# Altium PCB 175-00016_rev1 SuperFin GPIO Apps Board_OLD.PcbDoc
Units mil, origin at the board's own origin, x right, y up, seen from the top; angles counter-clockwise.
Board outline 3307.09 x 1358.27 mil, 6 copper layers (Top Layer, Mid-Layer 1, Internal Plane 1, Internal Plane 2, Internal Plane 3, Bottom Layer); 53 components, 119 nets, 342 pads, 90 vias.
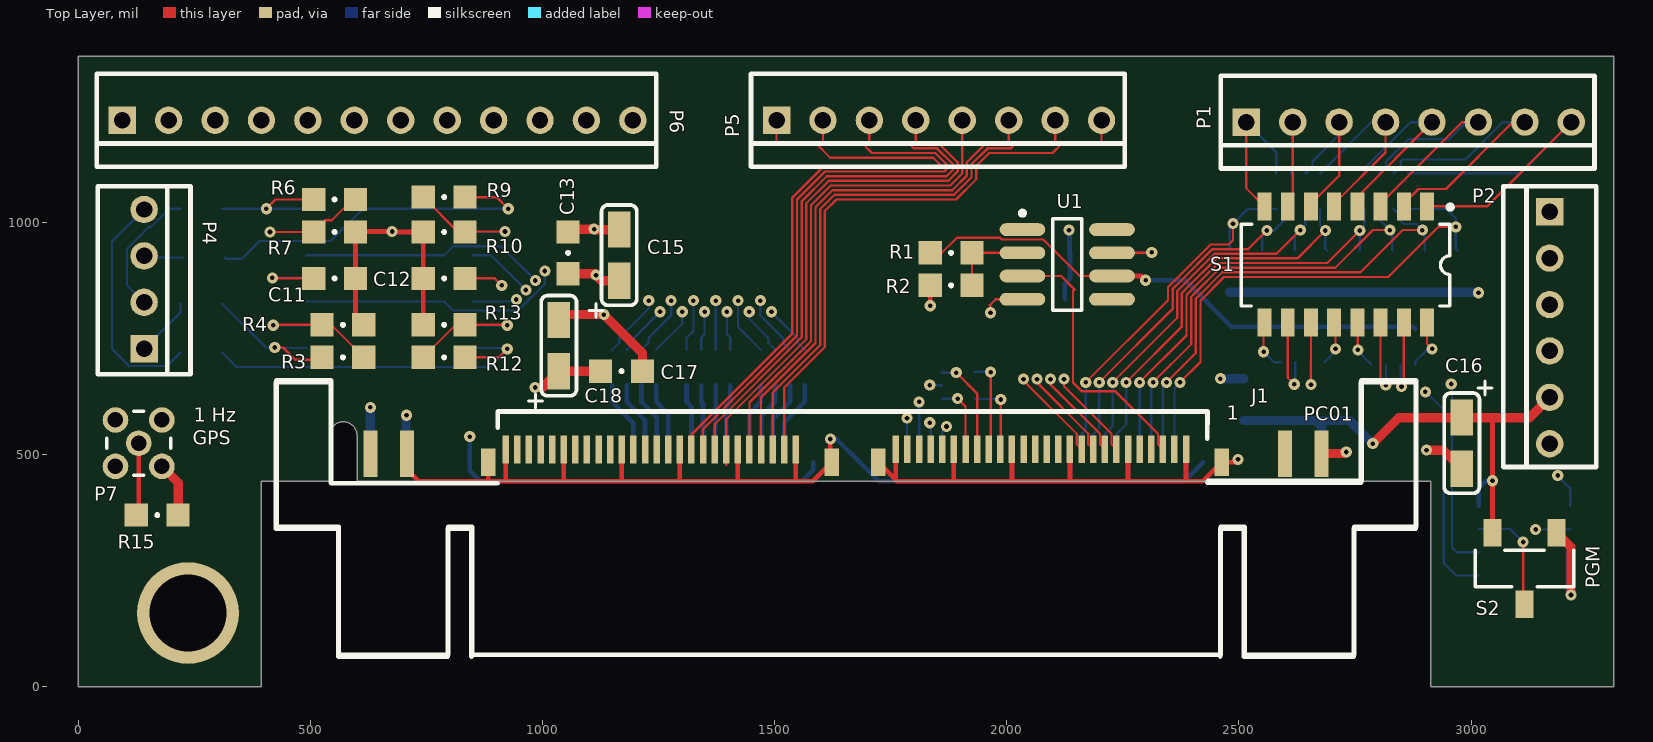
[diagram p0: Top Layer view]
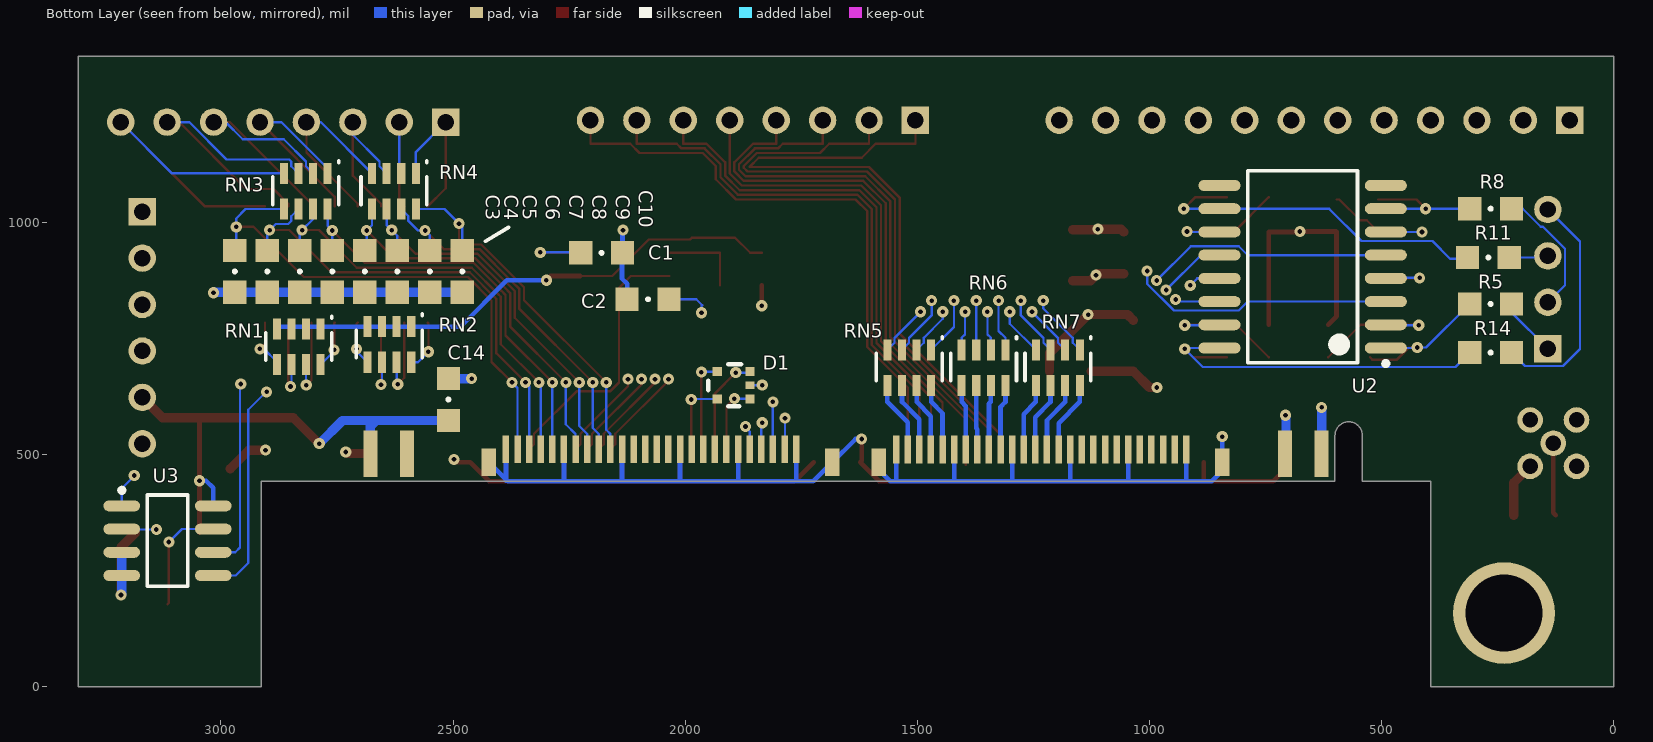
[diagram p1: Bottom Layer view, seen from below]
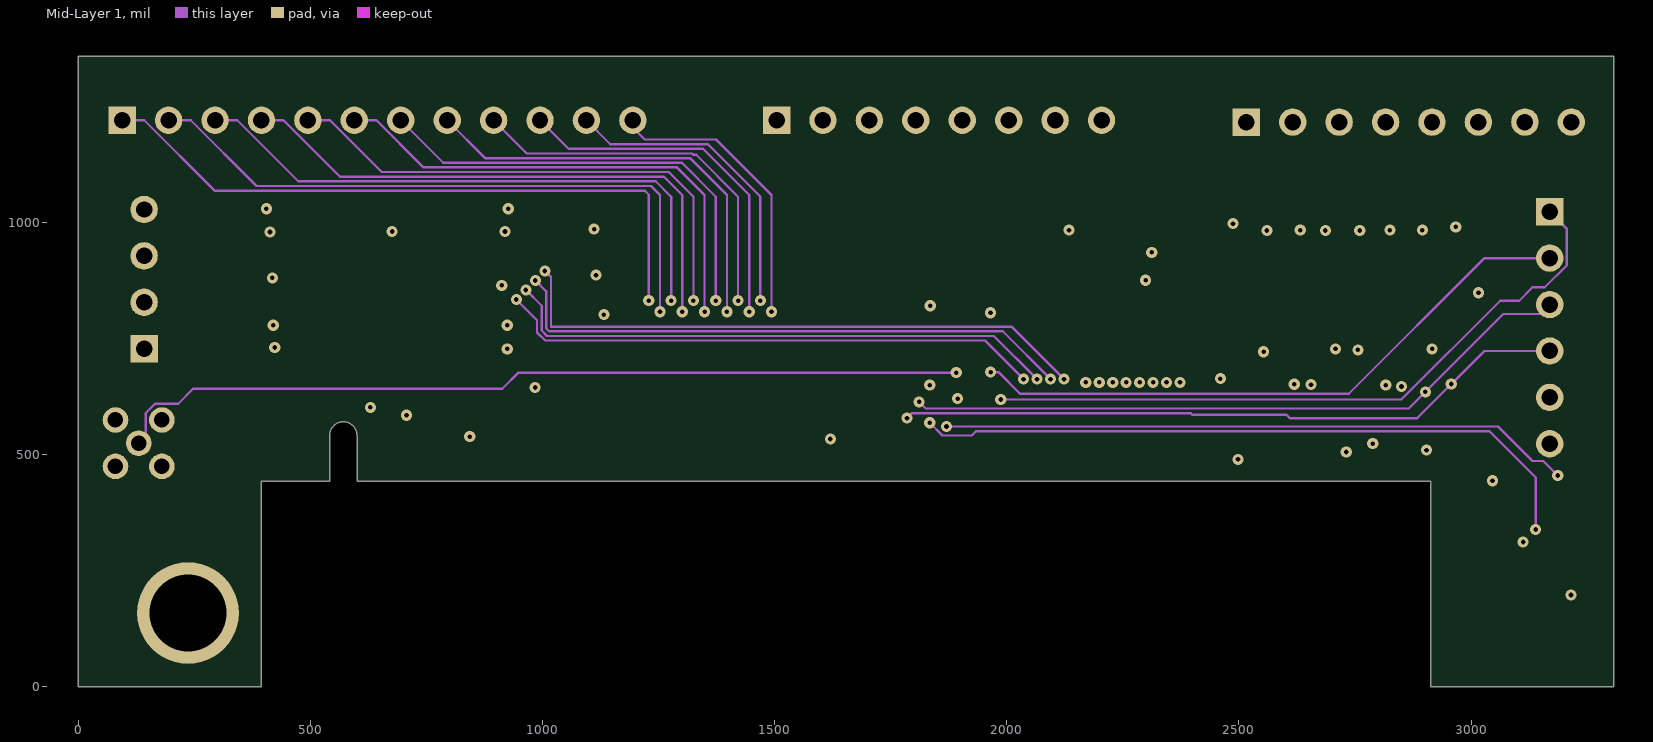
[diagram p2: Mid-Layer 1]
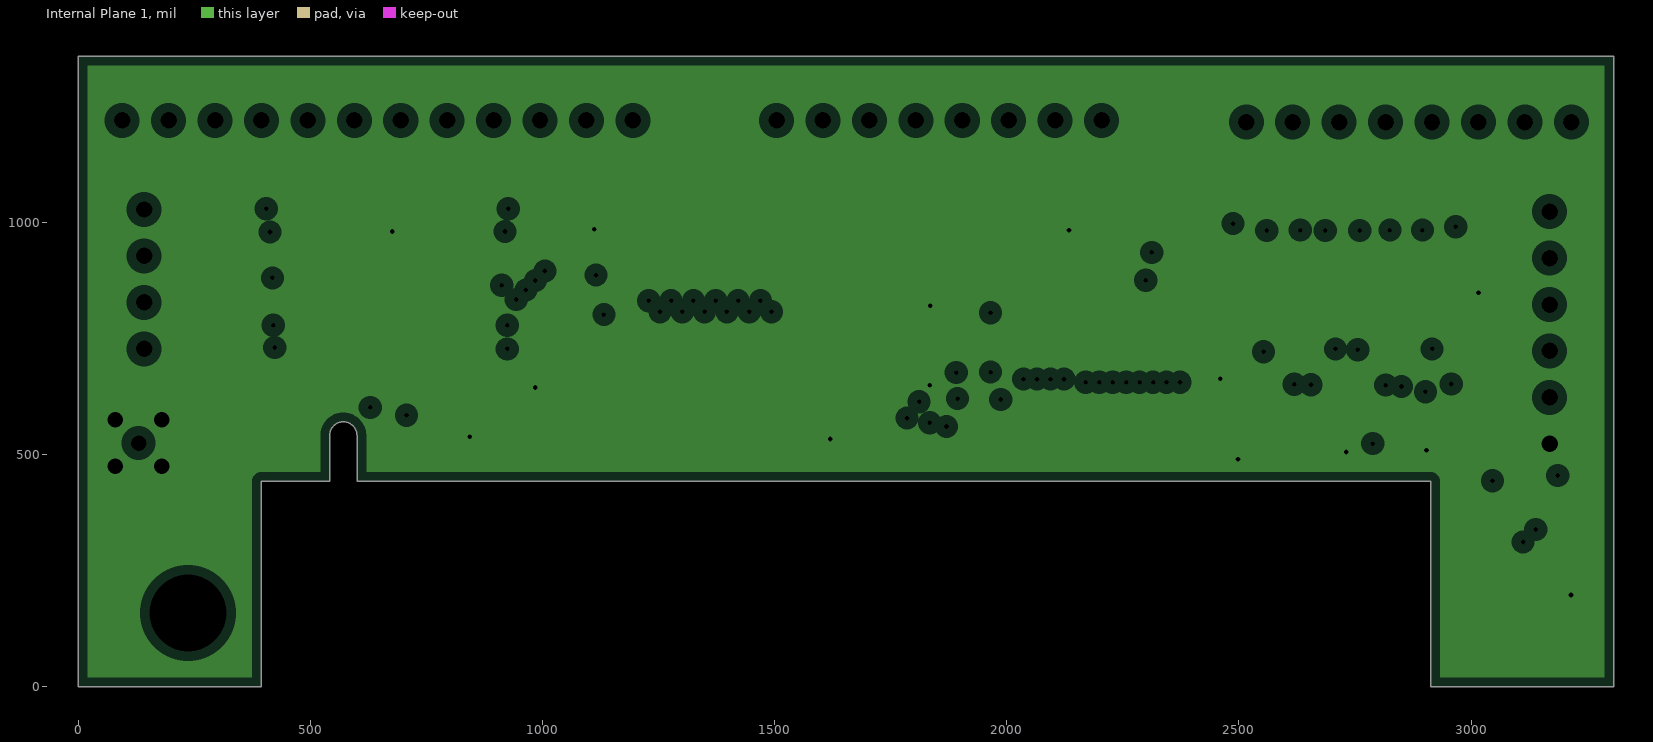
[diagram p3: Internal Plane 1, clearances drawn from the general rule]
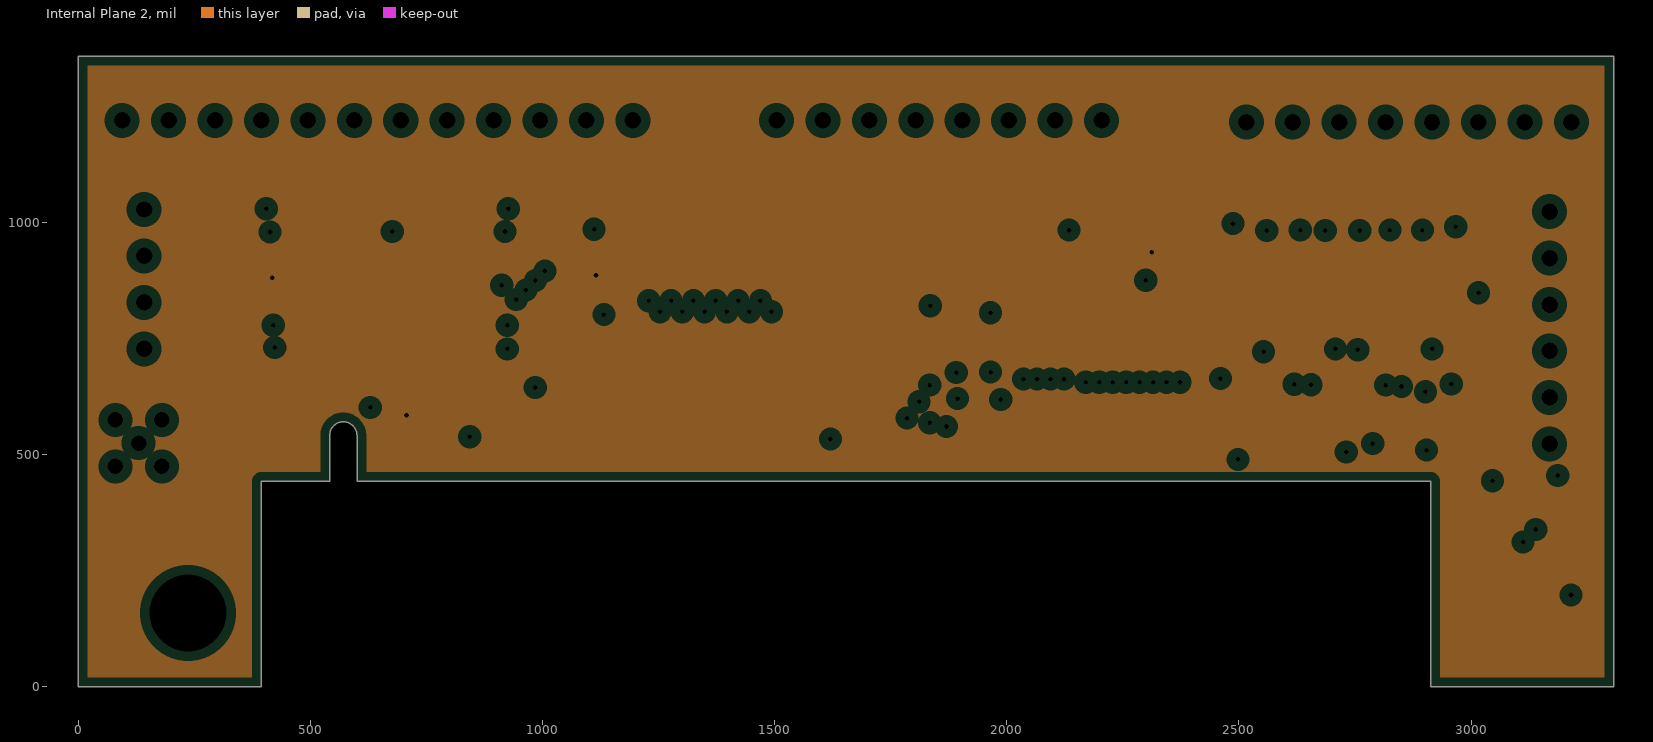
[diagram p4: Internal Plane 2, clearances drawn from the general rule]
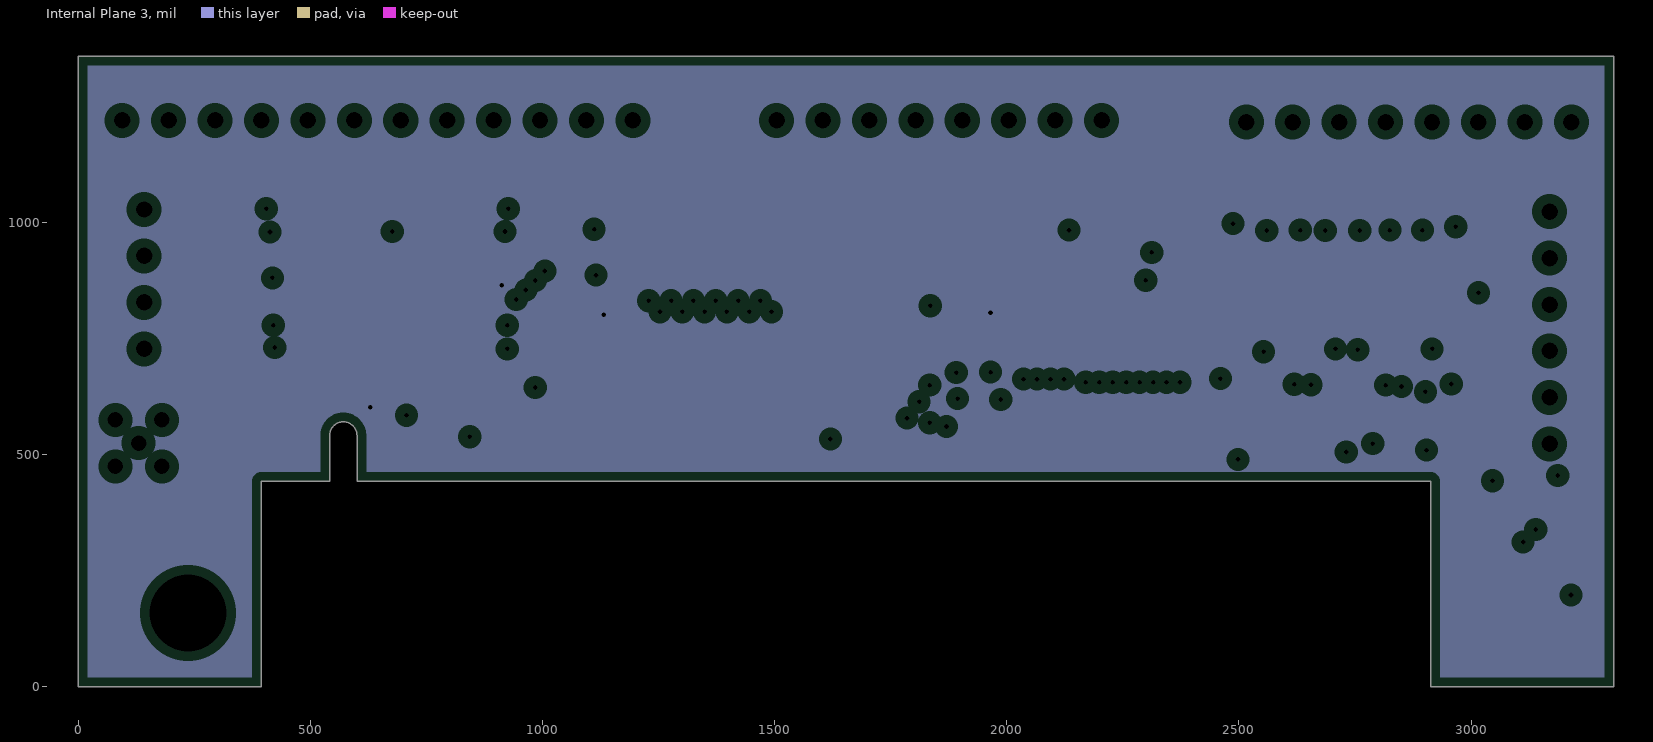
[diagram p5: Internal Plane 3, clearances drawn from the general rule]

## Layer stack, top to bottom
Top Layer: signal copper 1.4
Dielectric: core 12.6, FR-4, Dk 4.8
Mid-Layer 1: signal copper 1.4
Dielectric: prepreg 12.6, FR-4, Dk 4.8
Internal Plane 1: plane copper 1.4, net GND
Dielectric: core 12.6, FR-4, Dk 4.8
Internal Plane 2: plane copper 1.4, net +12V
Dielectric: prepreg 12.6, FR-4, Dk 4.8
Internal Plane 3: plane copper 1.4, net -12V
Dielectric: core 12.6, FR-4, Dk 4.8
Bottom Layer: signal copper 1.4

## Board outline
0,0 0,1358.27 3307.09,1358.27 3307.09,442.91 3307.09,0 2913.39,0 2913.39,442.91 600.29,442.91 600.29,541.34 ccw(c570.77,541.34) 541.24,541.34 541.24,442.91 393.7,442.91 393.7,0

## Design rules (kind name [scope] priority, off if disabled: settings)
Clearance [All] p1: gap=5
ComponentClearance ComponentClearance_1 [(InComponent('J1'))] p1: gap=-393.7 collisioncheckmode=3 verticalgap=-393.7 showdistances=FALSE
ComponentClearance [All] p2: gap=10 collisioncheckmode=3 verticalgap=10 showdistances=FALSE
HoleSize [All] p1: absolutevalues=TRUE maxlimit=250 minlimit=1 maxpercent=80.000 minpercent=20.000
MinimumSolderMaskSliver [All] p1: minsoldermaskwidth=1
PlaneClearance [All] p1: clearance=20
PlaneConnect [All] p1: planeconnectstyle=Relief reliefexpansion=20 reliefentries=4 reliefconductorwidth=10 reliefairgap=10
PolygonConnect [All] p1: connectstyle=Relief reliefconductorwidth=10 reliefentries=4 polygonreliefangle="90 Angle"
RoomDefinition "780-00019 Rev1 Pg1" [InComponentClass('780-00019 Rev1 Pg1')] p1: confinementstyle=ConfineIn formatcopy=TRUE lockcomponents=FALSE outline -75,-241 3389,-241 3389,2032.91 -75,2032.91
RoutingVias [All] p1: holewidth=10 width=24 viastyle="Through Hole" minholewidth=10 minwidth=24 maxholewidth=28 maxwidth=50
SilkToSilkClearance [All] p1: silktosilkclearance=1
SilkscreenOverComponentPads [All] p1: minsilkscreentomaskgap=1
SolderMaskExpansion [All] p1: expansion=4
Width [All] p1: maxlimit=20 minlimit=5 preferedwidth=5
21 further rules are at their usual default settings.

## Components (designator, comment, footprint, x,y, rotation, side; value= is the part's Value field where it differs from the comment)
C1 "Cap SMD" SMD_0805 2180,935 r180 bottom
C2 "Cap SMD" SMD_0805 2080,835 r0 bottom
C3 "Cap SMD" SMD_0805 2970,895 r90 bottom
C4 "Cap SMD" SMD_0805 2900,895 r90 bottom
C5 "Cap SMD" SMD_0805 2830,895 r90 bottom
C6 "Cap SMD" SMD_0805 2760,895 r90 bottom
C7 "Cap SMD" SMD_0805 2690,895 r90 bottom
C8 "Cap SMD" SMD_0805 2620,895 r90 bottom
C9 "Cap SMD" SMD_0805 2550,895 r90 bottom
C10 "Cap SMD" SMD_0805 2480,895 r90 bottom
C11 "Cap SMD" SMD_0805 551.89,880 r0 top
C12 "Cap SMD" SMD_0805 788.11,880 r180 top
C13 "Cap SMD" SMD_0805 1055,935 r90 top
C14 "Cap SMD" SMD_0805 2510,619 r90 bottom
C15 "16V" SMD_CAP_3216 1165,930 r270 top
C16 "16V" SMD_CAP_3216 2980,525 r90 top
C17 "Cap SMD" SMD_0805 1170,680 r0 top
C18 "16V" SMD_CAP_3216 1035,735 r270 top
D1 "PESD3V3L4UG" SOT-353 1860,620 r0 bottom
J1 "QMSS-EM-PC4-104pin" "QMS EDGE PWR PINS - 104 pin" 1653.54,442.91 r0 top locked
P1 "Header 8" "HDR1X8 for IDC" 2515.75,1216.54 r0 top
P2 "Header 6" "HDR1X6 for IDC" 3169.29,1023.62 r270 top
P4 "Header 4" "HDR1X4 for IDC" 141.73,728.35 r90 top
P5 "Header 8" "HDR1X8 for IDC" 1503.94,1220.47 r0 top
P6 "Header 12" "HDR1X12 for IDC" 94.49,1220.47 r0 top
P7 "COAX MMCX" MMCX2.54-V5 130,525 r0 top
R1 "Res 0805" SMD_0805 1880,935 r180 top
R2 "Res 0805" SMD_0805 1880,865 r0 top
R3 "Res 0805" SMD_0805 570,710 r180 top
R4 "Res 0805" SMD_0805 570,780 r180 top
R5 "Res 0805" SMD_0805 265,825 r0 bottom
R6 "Res 0805" SMD_0805 551.89,1050 r180 top
R7 "Res 0805" SMD_0805 551.89,980 r180 top
R8 "Res 0805" SMD_0805 265,1030 r0 bottom
R9 "Res 0805" SMD_0805 788.11,1055 r0 top
R10 "Res 0805" SMD_0805 788.11,980 r0 top
R11 "Res 0805" SMD_0805 270,925 r0 bottom
R12 "Res 0805" SMD_0805 788.11,710 r0 top
R13 "Res 0805" SMD_0805 788.11,780 r0 top
R14 "Res 0805" SMD_0805 265,720 r0 bottom
R15 "Res 0805" SMD_0805 170,370 r180 top
RN1 "RES ARRAY  x4 10K" "RES ARRAY 0603 x 4" 2785,775 r0 bottom
RN2 "RES ARRAY  x4 10K" "RES ARRAY 0603 x 4" 2590,780 r0 bottom
RN3 "RES ARRAY  x4 10K" "RES ARRAY 0603 x 4" 2770,1110 r0 bottom
RN4 "RES ARRAY  x4 10K" "RES ARRAY 0603 x 4" 2580,1110 r0 bottom
RN5 "RES ARRAY  x4 10K" "RES ARRAY 0603 x 4" 1470,730 r0 bottom
RN6 "RES ARRAY  x4 10K" "RES ARRAY 0603 x 4" 1310,730 r0 bottom
RN7 "RES ARRAY  x4 10K" "RES ARRAY 0603 x 4" 1150,730 r0 bottom
S1 "SW DIP-8 Half Pitch" "SW DIP 8 pos half pitch" 2730,910 r270 top
S2 "CJS-1200TB" CAS-120B 3115,255 r180 top
U1 "LT1007CS8#PBF" S8_M 2130,910 r0 top
U2 "LT1014ISW#PBF" SW16_N 670,905 r0 bottom
U3 "M24C32RMN1" SOP8_N 3115,315 r180 bottom

## Footprints (in the part's own frame and the unit in brackets; to place one, negate y for a bottom-side part, rotate by r counter-clockwise, add the part's x,y. Pads: shape width x height; smd on the part's side, far side on the other; paste and mask are expansions set on the pad)
CAS-120B [mm] "Copal Electronics CAS SMD Slide Switch"
  rect 1x1.5 smd: 1(-1.75,-1.95) 2(0,1.95) 3(1.75,-1.95)
  silkscreen extent -2.69,-1 2.69,1
"HDR1X4 for IDC" [mm] "Connector; Header; 4 Position"
  rect 1.5x1.5 hole 0.9: 1(0,0)
  round 1.5 hole 0.9: 2(2.54,0) 3(5.08,0) 4(7.62,0)
  silkscreen extent -1.4,-2.54 8.89,2.54
"HDR1X6 for IDC" [mm] "Connector; Header; 6 Position"
  rect 1.5x1.5 hole 0.9: 1(0,0)
  round 1.5 hole 0.9: 2(2.54,0) 3(5.08,0) 4(7.62,0) 5(10.16,0) 6(12.7,0)
  silkscreen extent -1.4,-2.54 13.97,2.54
"HDR1X8 for IDC" [mm] "Connector; Header; 8 Position"
  rect 1.5x1.5 hole 0.9: 1(0,0)
  round 1.5 hole 0.9: 2(2.54,0) 3(5.08,0) 4(7.62,0) 5(10.16,0) 6(12.7,0) 7(15.24,0) 8(17.78,0)
  silkscreen extent -1.4,-2.54 19.05,2.54
"HDR1X12 for IDC" [mm] "Connector; Header; 12 Position"
  rect 1.5x1.5 hole 0.9: 1(0,0)
  round 1.5 hole 0.9: 2(2.54,0) 3(5.08,0) 4(7.62,0) 5(10.16,0) 6(12.7,0) 7(15.24,0) 8(17.78,0) 9(20.32,0) 10(22.86,0) 11(25.4,0) 12(27.94,0)
  silkscreen extent -1.4,-2.54 29.21,2.54
MMCX2.54-V5 [mm] "Connector; RF Coaxial, MMCX, Thru-Hole; 5 Position; Vertical"
  round 1.4 hole 0.85: 1(0,0) 2(-1.27,-1.27) 3(1.27,-1.27) 4(1.27,1.27) 5(-1.27,1.27)
  silkscreen extent -1.75,-1.75 1.75,1.75
"QMS EDGE PWR PINS - 104 pin" [mil] "52 pos (104 pin) + 8 pwr pins"
  rect 14x60 smd: 0(132.45,69.15) 1(732.45,69.15) 3(707.45,69.15) 5(682.45,69.15) 7(657.45,69.15) 9(632.45,69.15) 11(607.45,69.15) 13(582.45,69.15) 15(557.45,69.15) 17(532.45,69.15) 19(507.45,69.15) 21(482.45,69.15) 23(457.45,69.15) 25(432.45,69.15) 27(407.45,69.15) 29(382.45,69.15) 31(357.45,69.15) 33(332.45,69.15) 35(307.45,69.15) 37(282.45,69.15) 39(257.45,69.15) 41(232.45,69.15) 43(207.45,69.15) 45(182.45,69.15) 47(157.45,69.15) 51(107.45,69.15) 53(-107.89,68.09) 55(-132.89,68.09) 57(-157.89,68.09) 59(-182.89,68.09) 61(-207.89,68.09) 63(-232.89,68.09) 65(-257.89,68.09) 67(-282.89,68.09) 69(-307.89,68.09) 71(-332.89,68.09) 73(-357.89,68.09) 75(-382.89,68.09) 77(-407.89,68.09) 79(-432.89,68.09) 81(-457.89,68.09) 83(-482.89,68.09) 85(-507.89,68.09) 87(-532.89,68.09) 89(-557.89,68.09) 91(-582.89,68.09) 93(-607.89,68.09) 95(-632.89,68.09) 97(-657.89,68.09) 99(-682.89,68.09) 101(-707.89,68.09) 103(-732.89,68.09)
  rect 14x60 smd far side: 2(732.45,69.15) 4(707.45,69.15) 6(682.45,69.15) 8(657.45,69.15) 10(632.45,69.15) 12(607.45,69.15) 14(582.45,69.15) 16(557.45,69.15) 18(532.45,69.15) 20(507.45,69.15) 22(482.45,69.15) 24(457.45,69.15) 26(432.45,69.15) 28(407.45,69.15) 30(382.45,69.15) 32(357.45,69.15) 34(332.45,69.15) 36(307.45,69.15) 38(282.45,69.15) 40(257.45,69.15) 42(232.45,69.15) 44(207.45,69.15) 46(182.45,69.15) 48(157.45,69.15) 50(132.45,69.15) 52(107.45,69.15) 54(-107.89,68.09) 56(-132.89,68.09) 58(-157.89,68.09) 60(-182.89,68.09) 62(-207.89,68.09) 64(-232.89,68.09) 66(-257.89,68.09) 68(-282.89,68.09) 70(-307.89,68.09) 72(-332.89,68.09) 74(-357.89,68.09) 76(-382.89,68.09) 78(-407.89,68.09) 80(-432.89,68.09) 82(-457.89,68.09) 84(-482.89,68.09) 86(-507.89,68.09) 88(-532.89,68.09) 90(-557.89,68.09) 92(-582.89,68.09) 94(-607.89,68.09) 96(-632.89,68.09) 98(-657.89,68.09) 100(-682.89,68.09) 102(-707.89,68.09) 104(-732.89,68.09)
  rect 31x60 smd: 105(809.45,41.09) 107(69.45,41.09) 109(-30.55,41.09) 111(-770.55,41.09)
  rect 31x60 smd far side: 106(769.45,41.09) 108(29.45,41.09) 110(-70.55,41.09) 112(-810.55,41.09)
  rect 30x100 smd: PC01(1024.45,59.65) PC03(945.55,59.65) PC05(-945.55,59.15) PC07(-1024.45,59.15)
  rect 30x100 smd far side: PC02(1024.45,59.65) PC04(945.55,59.65) PC06(-945.55,59.15) PC08(-1024.45,59.15)
  silkscreen extent -1228,-377 1229,217
"RES ARRAY 0603 x 4" [mm]
  rect 0.44x1.15 smd: 1(0,0.1) 2(0,2.05) 3(0.8,0.1) 4(0.8,2.05) 5(1.6,0.1) 6(1.6,2.05) 7(2.4,0.1) 8(2.4,2.05)
  silkscreen extent -0.6,-0.6 3,1.8
S8_M [mm] "SOIC, 8-Leads, Body 4.9x3.9mm, Pitch 1.27mm, IPC Low Density"
  oval 2.5x0.7 smd: 1(-2.45,1.905) 2(-2.45,0.635) 3(-2.45,-0.635) 4(-2.45,-1.905) 5(2.45,-1.905) 6(2.45,-0.635) 7(2.45,0.635) 8(2.45,1.905)
  silkscreen extent -2.57,-2.5 0.8,2.93, body extent -2,-2.5 2,2.5, height 1.76
SMD_0805 [mil]
  rect 50x50 smd: 1(-45,0) 2(45,0)
  silkscreen extent -1,-1 1,1
SMD_CAP_3216 [mil]
  rect 78x48 smd: 1(55,0) 2(-55,0)
  silkscreen extent -108,-65 134,38
SOP8_N [mm] "SOIC, 8-Leads, Body 4.9x3.9mm, Pitch 1.27mm, IPC Medium Density"
  oval 2x0.6 smd: 1(-2.5,1.905) 2(-2.5,0.635) 3(-2.5,-0.635) 4(-2.5,-1.905) 5(2.5,-1.905) 6(2.5,-0.635) 7(2.5,0.635) 8(2.5,1.905)
  silkscreen extent -2.63,-2.5 1.1,2.88, body extent -2,-2.5 2,2.5, height 1.75
SOT-353 [mm]
  rect 0.5x0.5 smd: 1(0,0) 3(0,-1.5) 4(1.8,-1.5) 5(1.8,0)
  rect 0.5x0.4 smd: 2(0,-0.75)
  silkscreen extent 0.5,-1.9 2.3,0.4
SW16_N [mm] "SOIC, 16-Leads, Body 10.3x7.5mm, Pitch 1.27mm, IPC Medium Density"
  oval 2.3x0.6 smd: 1(-4.55,4.445) 2(-4.55,3.175) 3(-4.55,1.905) 4(-4.55,0.635) 5(-4.55,-0.635) 6(-4.55,-1.905) 7(-4.55,-3.175) 8(-4.55,-4.445) 9(4.55,-4.445) 10(4.55,-3.175) 11(4.55,-1.905) 12(4.55,-0.635) 13(4.55,0.635) 14(4.55,1.905) 15(4.55,3.175) 16(4.55,4.445)
  silkscreen extent -4.67,-5.25 3,5.42, body extent -3.75,-5.25 3.75,5.25, height 2.65
"SW DIP 8 pos half pitch" [mil] "Grayhill 97C08ST, 8 SPST switch, surface mount"
  rect 60x30 smd: 1(-125,175) 2(-125,125) 3(-125,75) 4(-125,25) 5(-125,-25) 6(-125,-75) 7(-125,-125) 8(-125,-175) 9(125,-175) 10(125,-125) 11(125,-75) 12(125,-25) 13(125,25) 14(125,75) 15(125,125) 16(125,175)
  silkscreen extent -128,-225 90,230

## Part data
C1 C2 C11 C12 C13 C14 C17: "Capacitor"
C3 C4 C5 C6 C7 C8 C9 C10: "Capacitor NP0"
C15 C16 C18: library part "Cap Tant 16V", "outline 3.2mm x 1.6mm"
D1: library part "ESD Diode 3.3V Quad", "Quad ESD Diode 3.3V"
J1: "SAMTEC QMSS EDGE W/PWR PINS"
P1 P5: "Header, 8-Pin"
P2: "Header, 6-Pin"
P4: "Header, 4-Pin"
P6: "Header, 12-Pin"
P7: library part COAX-M, "RF Coaxial PCB Connector, MMCX; Thru-Hole, Vertical Mount Plug,  50 Ohm Impedance"
R1 R2 R3 R4 R5 R6 R7 R8 R9 R10 R11 R12 R13 R14 R15: library part "Res SMD", "Resistor 0805"
RN1 RN2 RN3 RN4 RN5 RN6 RN7: "Resistor Array 4 Isolated"
S1: "DIP Switch, 8 Position, SPST"
S2: library part SW_SPDT_DOUG
U1: "Low Noise BJT input opamp"
U2: "Quad Precision Operational Amplifier"
U3: "32 Kbit Serial I²C Bus EEPROM"

## Free pads (board coordinates)
  round 218.9 hole 166.14 unplated: 0(236.22,159.06)

## Via types
v1: diameter 24, hole 10, Top Layer to Bottom Layer, 90 vias

## Nets (pads, with @x,y where several pads share a name; then routed paths per layer and width w, separated by ;. In a path a pad name is that pad's centre, name@x,y a point inside that pad or via, vN(x,y) a via of type N, cw(c..) or ccw(c..) an arc to the next point about the centre after c; other vN are vias at no path point)
2.500VREF: J1.5 U1.3 | length 592.3
  Top Layer w5: U1.3 2117,885 2146,856 2142.5,852.5 2142.5,655.92 2161.92,636.5 2234.16,636.5 2325.49,545.17 2325.49,522.56 J1.5
4.096VREF: J1.3
+3.3V: C14.1 C16.1 J1.PC02 P2.5 S2.3 U3.8 | length 1121.6
  Top Layer w10: S2.3 v1(3046.1,444) 3046.1,579.1 3047,580
  Top Layer w20: v1(2788,524) 2844,580 C16.1 3047,580 3125.67,580 P2.5
  Bottom Layer w10: U3.8 3016.57,428.57 3032,444 v1(3046.1,444)
  Bottom Layer w20: C14.1 2666,574 ; J1.PC02 2677.99,559.99 2679,561 2666,574 ; v1(2788,524) 2738,574 2666,574
+5V: J1.PC04
+12V: C1.1 C11.1 C13.1 C15.1 J1.PC06 U1.7 U2.4 | length 536.3
  Top Layer w5: v1(418,881) 419,880 C11.1 ; U1.7 2311,935 v1(2312,936)
  Top Layer w20: C13.1 1112,890 v1(1115,887) 1127,875 C15.1
  Bottom Layer w5: v1(418,881) 489.87,881 U2.4 ; C1.1 2226,936 v1(2312,936)
  Bottom Layer w20: v1(707,585) 706,584 706,504.05 J1.PC06
+24V: J1.PC07
+48V: J1.PC03
-12V: C2.1 C12.1 C17.2 C18.2 J1.PC08 U1.4 U2.13 | length 699.2
  Top Layer w5: C12.1 897,880 v1(912,865) ; v1(1964.65,806) 1964.65,820.35 1963,822 1976,835 U1.4
  Top Layer w20: C18.2 1047,802 v1(1132,802) 1215,719 C17.2
  Bottom Layer w5: U2.13 897,880 v1(912,865) ; v1(1964.65,806) 1964.65,820.35 1963,822 1976,835 C2.1
  Bottom Layer w20: v1(629,602) 629.09,601.91 J1.PC08
ANALOG_IN0: C3.2 J1.4 RN3.8 | length 1140.2
  Top Layer w5: v1(2372.99,656) 2417,700.01 2417,832 2468,883 2821.58,883 2929.58,991 v1(2967,991)
  Bottom Layer w5: J1.4 2360.99,644 v1(2372.99,656) ; RN3.8 2946.71,1029.29 2967,1009 v1(2967,991) 2967,943 C3.2
ANALOG_IN1: C4.2 J1.6 RN3.6 | length 1035.7
  Top Layer w5: v1(2343.99,656) 2407,719.01 2407,836.14 2409.93,839.07 2463.86,893 2761.58,893 2852.58,984 v1(2895,984)
  Bottom Layer w5: J1.6 2335.99,648 v1(2343.99,656) ; RN3.6 2848.33,1013.96 2848.33,1003.55 2854.87,997 2882,997 v1(2895,984) 2900,979 C4.2
ANALOG_IN2: C5.2 J1.8 RN3.4 | length 952.5
  Top Layer w5: v1(2314.99,656) 2397,738.01 2397,840.28 2402.86,846.14 2459.72,903 2707.58,903 2788.58,984 v1(2825,984)
  Bottom Layer w5: J1.8 2310.99,652 v1(2314.99,656) ; RN3.4 2801.5,1007.5 v1(2825,984) 2830,979 C5.2
ANALOG_IN3: C6.2 J1.10 RN3.2 | length 898
  Top Layer w5: v1(2285.99,656) 2387,757.01 2387,844.43 2395.79,853.21 2455.57,913 2690,913 v1(2760,983)
  Bottom Layer w5: J1.10 v1(2285.99,656) ; C6.2 v1(2760,983) 2770,993 RN3.2
ANALOG_IN4: C7.2 J1.14 RN4.8 | length 855.3
  Top Layer w5: v1(2256.99,656) 2377,776.01 2377,848.57 2388.72,860.28 2451.43,923 2626,923 v1(2686,983)
  Bottom Layer w5: J1.14 2235.99,544.91 2256.99,565.91 v1(2256.99,656) ; RN4.8 2674.49,994.51 v1(2686,983) 2686,944 C7.2
ANALOG_IN5: C8.2 J1.16 RN4.6 | length 823.5
  Top Layer w5: v1(2227.99,656) 2367,795.01 2367,852.71 2381.64,867.36 2447.29,933 2581,933 v1(2632,984)
  Bottom Layer w5: J1.16 2210.99,544.91 2227.99,561.91 v1(2227.99,656) ; C8.2 2620,972 v1(2632,984) 2642.99,994.99 RN4.6
ANALOG_IN6: C9.2 J1.18 RN4.4 | length 794.8
  Top Layer w5: v1(2198.99,656) 2357,814.01 2357,856.85 2374.57,874.43 2443.15,943 2520,943 v1(2560,983)
  Bottom Layer w5: J1.18 2185.99,544.91 2198.99,557.91 v1(2198.99,656) ; C9.2 2550,973 v1(2560,983) 2575.61,983 2596.16,1003.55 2596.16,1013.96 RN4.4
ANALOG_IN7: C10.2 J1.20 RN4.2 | length 810.7
  Top Layer w5: v1(2169.99,656) 2347,833.01 2347,860.99 2367.5,881.5 2439.01,953 2478,953 2487,962 v1(2487,998)
  Bottom Layer w5: J1.20 2160.99,544.91 2169.99,553.91 v1(2169.99,656) ; C10.2 2480,991 v1(2487,998) 2518.29,1029.29 RN4.2
DAC_OUT0: J1.13 U2.3 | length 2048.6
  Top Layer w5: v1(2123,663) 2123,647.66 2225.49,545.17 2225.49,522.56 J1.13
  Mid-Layer 1 w5: v1(1005,896) 1018,883 1018,776 2010,776 v1(2123,663)
  Bottom Layer w5: U2.3 788.36,830 807.67,810.69 947.27,810.69 1005,868.42 v1(1005,896)
DAC_OUT1: J1.15 U2.5 | length 1976.1
  Top Layer w5: v1(2094,663) 2094,651.66 2200.49,545.17 2200.49,522.56 J1.15
  Mid-Layer 1 w5: v1(984.49,875.49) 1008,851.99 1008,771.86 1013.86,766 1991,766 v1(2094,663)
  Bottom Layer w5: U2.5 788.36,930 807.67,949.31 910.68,949.31 v1(984.49,875.49)
DAC_OUT2: J1.17 U2.12 | length 1558.7
  Top Layer w5: v1(2065,663) 2065,655.66 2175.49,545.17 2175.49,522.56 J1.17
  Mid-Layer 1 w5: v1(963.99,854.99) 998,820.98 998,767.72 1009.72,756 1972,756 v1(2065,663)
  Bottom Layer w5: U2.12 888.98,930 v1(963.99,854.99)
DAC_OUT3: J1.19 U2.14 | length 1474.6
  Top Layer w5: v1@2036,659.66 2150.49,545.17 2150.49,522.56 J1.19
  Mid-Layer 1 w5: v1(943.48,834.48) 988,789.96 988,763.57 1005.57,746 1953,746 v1(2036,663)
  Bottom Layer w5: U2.14 939,830 v1(943.48,834.48)
DIRECTION1: J1.99
DIRECTION2: J1.101
GND: C1.2 C2.2 C3.1 C4.1 C5.1 C6.1 C7.1 C8.1 C9.1 C10.1 C11.2 C12.2 C13.2 C14.2 C15.2 C16.2 C17.1 C18.1 D1.2 J1.1 J1.2 J1.11 J1.12 J1.21 J1.22 J1.31 J1.32 J1.41 J1.42 J1.51 J1.52 J1.53 J1.54 J1.63 J1.64 J1.73 J1.74 J1.83 J1.84 J1.93 J1.94 J1.103 J1.104 J1.105 J1.106 J1.107 J1.108 J1.109 J1.110 J1.111 J1.112 J1.PC01 J1.PC05 P2.6 P7.2 P7.3 P7.4 P7.5 R2.1 R4.1 R7.1 R10.1 R13.1 R15.1 S2.1 U3.3 U3.4 | length 7358.1
  Top Layer w10: R4.1 596.89,798.11 R7.1 597.89,981 v1(676,981) 677,980 R10.1 C12.2 R13.1 ; J1.PC05 707.99,467.92 733,442.91 885,442.91 ; J1.111 882.99,444.92 885,442.91 ; 920.65,442.86 920.65,442.91 ; J1.103 920.65,442.91 ; 1045.65,442.86 1045.65,442.91 ; J1.93 1045.65,442.91 ; 1170.65,442.86 1170.65,442.91 ; J1.83 1170.65,442.91 ; 1295.65,442.86 1295.65,442.91 ; J1.73 1295.65,442.91 ; 1420.65,442.86 1420.65,442.91 ; J1.63 1420.65,442.91 ; 1545.65,442.86 1545.65,442.91 ; J1.53 1545.65,442.91 ; v1(1620,534) 1620,487 J1.109 1581.9,442.91 1545.65,442.91 ; J1.107 1764.08,442.91 2387,442.91 ; 1760.99,443.92 J1.51 ; v1(1835,821) R2.1 ; 1885.99,443.92 J1.41 ; 2010.99,443.92 J1.31 ; 2135.99,443.92 J1.21 ; 2260.99,443.92 J1.11 ; J1.1 2385.99,443.92 2387,442.91 ; v1(2498,490) 2492,484 J1.105 2421.9,442.91 2387,442.91 ; 885,442.91 920.65,442.91 ; 920.65,442.91 1045.65,442.91 ; 1045.65,442.91 1170.65,442.91 ; 1170.65,442.91 1295.65,442.91 ; 1295.65,442.91 1420.65,442.91 ; 1420.65,442.91 1545.65,442.91
  Top Layer w20: P7.3 215,440 R15.1 ; v1(984,645) 1000,645 C18.1 C17.1 ; C13.2 1061,986 v1(1111,986) 1112,985 C15.2 ; J1.PC01 2727.56,502.56 v1(2731,506) ; v1(2904,510) 2940,510 C16.2 ; S2.1 3215,300.67 v1(3215,198)
  Bottom Layer w5: v1(1834,650) 1834.47,649.53 D1.2
  Bottom Layer w10: v1@842.99,538.99 842.99,465.92 866,442.91 921,442.91 ; J1.104 920.65,455 920.65,443.26 921,442.91 ; 1045.65,442.91 J1.94 ; 1170.65,442.91 J1.84 ; 1295.65,442.91 J1.74 ; 1420.65,442.91 J1.64 ; 1545.65,442.91 J1.54 ; J1.110 1582.99,467.91 1558,442.91 921,442.91 ; v1(1620,534) 1633,534 J1.108 1724.08,442.91 1761,442.91 ; J1.52 1760.99,442.92 ; 1885.99,443.97 J1.42 ; 2010.99,443.97 J1.32 ; C2.2 2125,868 2136,879 2136,934 C1.2 2135,983 v1(2134,984) ; J1.22@2135.99,504 2135.99,442.91 ; 2260.99,443.97 J1.12 ; 2385.99,443.97 2385.99,447 ; J1.2 2385.99,447 ; J1.106 2385.99,447 ; 1761,442.91 2135.99,442.91 ; 2135.99,442.91 2381.9,442.91 2385.99,447
  Bottom Layer w20: v1(2460,664) C14.2 ; C10.1 3015,850 v1(3016,849) ; U3.3 U3.4 3213.43,199.57 v1(3215,198)
  other v1: 843,539
GP_I/OSPARE0: D1.5 J1.33 P2.1 | length 1633.7
  Top Layer w5: J1.33 1987,513.07 v1(1987,619)
  Mid-Layer 1 w5: v1(1987,619) 2849.58,619 3062.58,832 3103.61,832 3132.26,860.65 3158.68,860.65 3206.32,908.28 3206.32,986.59 P2.1
  Bottom Layer w5: D1.5 1986,620 v1(1987,619)
GP_I/OSPARE1: D1.4 J1.35 P2.2 | length 1546.7
  Top Layer w5: J1.35 1965,516.07 v1(1965,678)
  Mid-Layer 1 w5: v1(1965,678) 1982,678 2028.5,631.5 2736.5,631.5 3028.62,923.62 P2.2
  Bottom Layer w5: D1.4 1963.94,679.06 v1(1965,678)
GP_I/OSPARE2: D1.3 J1.37 P7.1 R15.2 | length 2225.5
  Top Layer w5: v1(1891,677) 1935.99,632.01 J1.37
  Top Layer w10: R15.2 130,375 P7.1
  Mid-Layer 1 w5: P7.1 144.94,539.94 144.94,589.52 165.48,610.06 215.06,610.06 247,642 913,642 948,677 v1(1891,677)
  Bottom Layer w5: D1.3 1862.06,677 v1(1891,677)
GP_I/OSPARE3: D1.1 J1.39 | length 150.4
  Top Layer w5: v1(1894,621) 1910.99,604.01 J1.39
  Bottom Layer w5: D1.1 1861,621 v1(1894,621)
GP_I/OSPARE4: J1.43
GP_I/OSPARE5: J1.45
GP_I/OSPARE6: J1.47
GP_OUT_D0: J1.55 P5.8 | length 1273.2
  Top Layer w5: J1.55 1520.65,644.92 1608,732.27 1608,1025.01 1632.99,1050 1890.51,1050 1933.94,1093.43 1933.94,1121.72 1962.22,1150 2098.08,1150 2118.08,1170 2203.94,1170 P5.8
GP_OUT_D1: J1.57 P5.7 | length 1191.9
  Top Layer w5: J1.57 1495.65,634.06 1598,736.41 1598,1029.15 1628.85,1060 1886.36,1060 1923.94,1097.57 1923.94,1125.86 1958.08,1160 2008.08,1160 2018.08,1170 2103.94,1170 P5.7
GP_OUT_D2: J1.59 P5.6 | length 1110.5
  Top Layer w5: J1.59 1470.65,623.2 1588,740.55 1588,1033.29 1624.71,1070 1882.22,1070 1913.94,1101.72 1913.94,1130 1953.94,1170 2003.94,1170 P5.6
GP_OUT_D3: J1.61 P5.5 | length 1050.1
  Top Layer w5: J1.61 1445.65,612.34 1578,744.69 1578,1037.43 1620.57,1080 1878.08,1080 1903.94,1105.86 P5.5
GP_OUT_D4: J1.65 P5.4 | length 1199.5
  Top Layer w5: J1.65 1395.65,477.91 1395.65,576.49 1568,748.84 1568,1041.57 1616.43,1090 1873.94,1090 1893.94,1110 1893.94,1130 1853.94,1170 1803.94,1170 P5.4
GP_OUT_D5: J1.67 P5.3 | length 1227.1
  Top Layer w5: J1.67 1370.65,565.63 1558,752.98 1558,1045.72 1612.28,1100 1869.79,1100 1883.94,1114.14 1883.94,1125.86 1849.79,1160 1799.79,1160 1789.79,1170 1703.94,1170 P5.3
GP_OUT_D6: J1.69 P5.2 | length 1320.9
  Top Layer w5: J1.69 1345.65,554.77 1548,757.12 1548,1049.86 1608.14,1110 1865.65,1110 1873.94,1118.28 1873.94,1121.72 1845.65,1150 1709.79,1150 1689.79,1170 1603.94,1170 P5.2
GP_OUT_D7: J1.71 P5.1 | length 1412.6
  Top Layer w5: J1.71 1320.65,543.91 1538,761.26 1538,1054 1604,1120 1861.51,1120 1841.51,1140 1619.79,1140 1589.79,1170 1503.94,1170 P5.1
GP_OUT_D8: J1.75
GP_OUT_D9: J1.77
GP_OUT_D10: J1.79
GP_OUT_D11: J1.81
GP_OUT_D12: J1.85
GP_OUT_D13: J1.87
GP_OUT_D14: J1.89
GP_OUT_D15: J1.91
I2C_SCL: J1.50 P2.4 U3.6 | length 1934.9
  Mid-Layer 1 w5: v1(1785,579) 1795.37,589.38 2396.31,589.38 2399.69,586 2602.25,586 2609.25,579 2884,579 3028.62,723.62 P2.4
  Bottom Layer w5: v1(1785,579) 1785,513.05 J1.50 ; v1(2957.34,652.34) 2959,650.68 2959,300 2969,290 U3.6
I2C_SDA: J1.48 P2.3 U3.5 | length 2031.2
  Mid-Layer 1 w5: v1(1811,614) 1825.5,599.5 2865.5,599.5 3069.26,803.26 3148.93,803.26 P2.3
  Bottom Layer w5: J1.48@1811,512.07 v1(1811,614) ; v1(2901.56,635.56) 2902.44,635.56 2941,597 2941,267 2968,240 U3.5
NetP1_1: P1.1 RN4.1 S1.8 | length 334.9
  Top Layer w5: P1.1 2515.75,1074.25 S1.8
  Bottom Layer w5: P1.1 2580,1152.28 RN4.1
NetP1_2: P1.2 RN4.3 S1.7 | length 298.2
  Top Layer w5: S1.7 2615.75,1045.75 P1.2
  Bottom Layer w5: RN4.3 2615.75,1110.31 P1.2
NetP1_3: P1.3 RN4.5 S1.6 | length 347.3
  Top Layer w5: S1.6 2655,1040.61 2715.75,1101.35 P1.3
  Bottom Layer w5: RN4.5 2658.33,1121.4 2658.33,1131.81 2715.75,1189.23 P1.3
NetP1_4: P1.4 RN4.7 S1.5 | length 414.4
  Top Layer w5: S1.5 2705,1040.61 2815.75,1151.35 P1.4
  Bottom Layer w5: RN4.7 2784.96,1216.54 P1.4
NetP1_5: P1.5 RN3.1 S1.4 | length 445.7
  Top Layer w5: S1.4 2755,1055.79 P1.5
  Bottom Layer w5: RN3.1 2770,1116.47 2870.06,1216.54 P1.5
NetP1_6: P1.6 RN3.3 S1.3 | length 555.3
  Top Layer w5: S1.3 2805,1040.61 2980.93,1216.54 P1.6
  Bottom Layer w5: RN3.3 2816.83,1121.4 2816.83,1131.81 2864.53,1179.51 2952.78,1179.51 2989.8,1216.54 P1.6
NetP1_7: P1.7 RN3.5 S1.2 | length 673.8
  Top Layer w5: S1.2 2855,1040.61 2886.89,1072.5 2945.77,1072.5 3089.8,1216.54 P1.7
  Bottom Layer w5: RN3.5 2848.33,1121.4 2848.33,1131.81 2852.72,1136.2 2987.78,1136.2 3068.11,1216.54 P1.7
NetP1_8: P1.8 RN3.7 S1.1 | length 783
  Top Layer w5: S1.1 3034.21,1035 P1.8
  Bottom Layer w5: RN3.7 3105.28,1106.06 P1.8
NetP4_1: P4.1 R5.1 | length 129.1
  Bottom Layer w5: P4.1 220,806.61 R5.1
NetP4_2: P4.2 R8.1 | length 281.7
  Bottom Layer w5: P4.2 104.7,865.37 104.7,943.68 152.34,991.32 157.07,991.32 195.75,1030 R8.1
NetP4_3: P4.3 R11.1 | length 84.7
  Bottom Layer w5: P4.3 145.08,925 R11.1
NetP4_4: P4.4 R14.1 | length 503.5
  Bottom Layer w5: P4.4 72.68,959.3 72.68,727.74 109.1,691.32 191.32,691.32 R14.1
NetP6_1: P6.1 RN7.1 | length 1567.4
  Mid-Layer 1 w5: P6.1 142.12,1220.47 293.6,1069 1220,1069 1228.74,1060.26 1228.74,1056 v1(1228.74,832)
  Bottom Layer w5: RN7.1 1165.33,741.4 1165.33,751.81 1228.74,815.22 v1(1228.74,832)
NetP6_2: P6.2 RN7.3 | length 1488
  Mid-Layer 1 w5: P6.2 242.12,1220.47 383.6,1079 1233.32,1079 1252.78,1059.54 1252.78,1031.96 v1(1252.78,807.96)
  Bottom Layer w5: RN7.3 1196.83,741.4 1196.83,751.81 1252.78,807.76 v1(1252.78,807.96)
NetP6_3: P6.3 RN7.5 | length 1406.8
  Mid-Layer 1 w5: P6.3 342.12,1220.47 473.6,1089 1243.83,1089 1276.83,1056 v1(1276.83,832)
  Bottom Layer w5: RN7.5 1228.33,741.4 1228.33,751.81 1276.83,800.31 v1(1276.83,832)
NetP6_4: P6.4 RN7.7 | length 1329.9
  Mid-Layer 1 w5: P6.4 442.12,1220.47 563.6,1099 1261.4,1099 1300.87,1059.54 v1(1300.87,807.96)
  Bottom Layer w5: RN7.7 1300.87,782.44 v1(1300.87,807.96)
NetP6_5: P6.5 RN6.1 | length 1234.7
  Mid-Layer 1 w5: P6.5 542.12,1220.47 653.6,1109 1271.91,1109 1324.91,1056 v1(1324.91,832)
  Bottom Layer w5: RN6.1 1310,751.91 1324.91,766.82 v1(1324.91,832)
NetP6_6: P6.6 RN6.3 | length 1157.7
  Mid-Layer 1 w5: P6.6 642.12,1220.47 743.6,1119 1289.49,1119 1348.95,1059.54 v1(1348.95,807.96)
  Bottom Layer w5: RN6.3 1341.5,751.91 1348.95,759.37 v1(1348.95,807.96)
NetP6_7: P6.7 RN6.5 | length 1076.6
  Mid-Layer 1 w5: P6.7 785.96,1129 1299.99,1129 1372.99,1056 v1(1372.99,832)
  Bottom Layer w5: RN6.5 v1(1372.99,832)
NetP6_8: P6.8 RN6.7 | length 1005.8
  Mid-Layer 1 w5: P6.8 875.96,1139 1317.57,1139 1397.03,1059.54 v1(1397.03,807.96)
  Bottom Layer w5: v1(1397.03,807.96) 1397.03,759.37 1404.49,751.91 RN6.7
NetP6_9: P6.9 RN5.1 | length 944.9
  Mid-Layer 1 w5: P6.9 965.96,1149 1321.71,1149 1324.67,1146.04 1331.04,1146.04 1421.08,1056 v1(1421.08,832)
  Bottom Layer w5: v1(1421.08,832) 1421.08,774.99 RN5.1
NetP6_10: P6.10 RN5.3 | length 874.1
  Mid-Layer 1 w5: P6.10 1055.96,1159 1345.65,1159 1445.12,1059.54 v1(1445.12,807.96)
  Bottom Layer w5: v1(1445.12,807.96) 1445.12,792.85 1486.16,751.81 1486.16,741.4 RN5.3
NetP6_11: P6.11 RN5.5 | length 799.2
  Mid-Layer 1 w5: P6.11 1145.96,1169 1356.16,1169 1469.16,1056 v1(1469.16,832)
  Bottom Layer w5: v1(1469.16,832) 1469.16,800.31 1517.66,751.81 1517.66,741.4 RN5.5
NetP6_12: P6.12 RN5.7 | length 737.7
  Mid-Layer 1 w5: P6.12 1194.49,1204.51 1220,1179 1373.74,1179 1493.2,1059.54 v1(1493.2,807.96)
  Bottom Layer w5: v1(1493.2,807.96) 1493.2,807.76 1549.15,751.81 1549.15,741.4 RN5.7
NetR1_1: R1.1 R2.2 U1.2 | length 178.5
  Top Layer w5: R2.2 R1.1 U1.2
NetR1_2: R1.2 RN1.1 RN1.3 RN1.5 RN1.7 RN2.1 RN2.3 RN2.5 RN2.7 U1.6 | length 1139.3
  Top Layer w5: R1.2 1860,935 1892.5,967.5 1985.52,967.5 1989.3,963.72 2078.28,963.72 2157,885 U1.6
  Top Layer w10: U1.6 2290,885 v1(2299,876)
  Bottom Layer w10: v1(2299,876) 2384,876 2483.94,776.06 RN2.1 RN2.3 RN2.5 RN2.7 2874.49,776.06 RN1.7
NetR3_1: R3.1 R4.2 U2.2 | length 295.7
  Top Layer w5: v1(420,779) 421,780 R4.2 545,780 R3.1
  Bottom Layer w5: v1(420,779) 489.87,779 U2.2
NetR3_2: R3.2 R5.2 U2.1 | length 335.1
  Top Layer w5: v1(423,731) 441,731 467,705 520,705 R3.2
  Bottom Layer w5: R5.2 404,731 v1(423,731) 424,730 U2.1
NetR6_1: R6.1 R7.2 U2.6 | length 290.8
  Top Layer w5: v1(413,980) R7.2 531.89,1005 546,1005 591,1050 R6.1
  Bottom Layer w5: v1(413,980) U2.6
NetR6_2: R6.2 R8.2 U2.7 | length 291
  Top Layer w5: v1(405,1030) 425,1050 R6.2
  Bottom Layer w5: R8.2 v1(405,1030) U2.7
NetR9_1: R9.1 R10.2 U2.11 | length 277.7
  Top Layer w5: R9.1 818.11,980 R10.2 834.11,981 v1(919,981)
  Bottom Layer w5: U2.11 918,980 v1(919,981)
NetR9_2: R9.2 R11.2 U2.10 | length 760.2
  Top Layer w5: R9.2 901,1055 v1(926,1030)
  Bottom Layer w5: R11.2 318,922 352,922 390.5,960.5 543.45,960.5 612.95,1030 U2.10 v1(926,1030)
NetR12_1: R12.1 R13.2 U2.15 | length 285.6
  Top Layer w5: R12.1 813.11,780 R13.2 923,780 v1(924,779)
  Bottom Layer w5: U2.15 850.13,779 v1(924,779)
NetR12_2: R12.2 R14.2 U2.16 | length 817
  Top Layer w5: R12.2 906,710 v1(924,728)
  Bottom Layer w5: R14.2 341,689 885,689 v1(924,728) 922,730 U2.16
NetRN1_2: RN1.2 S1.13 | length 103.1
  Top Layer w5: S1.13 2756,784 v1(2756,726)
  Bottom Layer w5: v1(2756,726) 2756,723.29 RN1.2
NetRN1_4: RN1.4 S1.14 | length 184.1
  Top Layer w5: S1.14 2805,661 v1(2816,650)
  Bottom Layer w5: v1(2816,650) 2816.5,650.5 RN1.4
NetRN1_6: RN1.6 S1.15 | length 188.2
  Top Layer w5: v1(2850,647) 2855,652 S1.15
  Bottom Layer w5: RN1.6 2847.99,649.01 v1(2850,647)
NetRN1_8: RN1.8 S1.16 | length 106.7
  Top Layer w5: S1.16 2905,739 v1(2916,728)
  Bottom Layer w5: RN1.8 2879.49,700.49 v1@2907,728
NetRN2_2: RN2.2 S1.9 | length 110.2
  Top Layer w5: v1(2553,722) 2553,783 S1.9
  Bottom Layer w5: v1(2553,722) 2575.71,699.29 RN2.2
NetRN2_4: RN2.4 S1.10 | length 187.1
  Top Layer w5: S1.10 2605,666 v1(2619,652)
  Bottom Layer w5: v1(2619,652) 2621.5,654.5 RN2.4
NetRN2_6: RN2.6 S1.11 | length 183.1
  Top Layer w5: v1(2655,651) S1.11
  Bottom Layer w5: RN2.6 2652.99,653.01 v1(2655,651)
NetRN2_8: RN2.8 S1.12 | length 96.7
  Top Layer w5: S1.12 2708,782 v1(2708,728)
  Bottom Layer w5: RN2.8 2708,722.8 v1(2708,728)
NetS2_2: S2.2 U3.7 | length 242
  Top Layer w5: v1(3112,312) 3112,181.23 S2.2
  Bottom Layer w5: U3.7 3084,340 v1(3112,312)
OPTO_INPUT_0: J1.56 RN5.8 | length 156.4
  Bottom Layer w10: J1.56 1520.65,569.98 1564.49,613.81 RN5.8
OPTO_INPUT_1: J1.58 RN5.6 | length 153.8
  Bottom Layer w10: J1.58 1495.65,576.47 1532.99,613.81 RN5.6
OPTO_INPUT_2: J1.60 RN5.4 | length 151.1
  Bottom Layer w10: J1.60 1470.65,582.97 1501.5,613.81 RN5.4
OPTO_INPUT_3: J1.62 RN5.2 | length 148.4
  Bottom Layer w10: J1.62 1445.65,589.46 1470,613.81 RN5.2
OPTO_INPUT_4: J1.66 RN6.8 | length 142
  Bottom Layer w10: J1.66 1395.65,604.98 1404.49,613.81 RN6.8
OPTO_INPUT_5: J1.68 RN6.6 | length 139.3
  Bottom Layer w10: J1.68 1370.65,554.76 1372.99,557.1 RN6.6
OPTO_INPUT_6: J1.70 RN6.4 | length 140
  Bottom Layer w10: RN6.4 1341.5,613.81 1345.65,609.66 J1.70
OPTO_INPUT_7: J1.72 RN6.2 | length 142.7
  Bottom Layer w10: RN6.2 1310,613.81 1320.65,603.16 J1.72
OPTO_INPUT_8: J1.76 RN7.8 | length 149.1
  Bottom Layer w10: RN7.8 1244.49,613.81 1270.65,587.65 J1.76
OPTO_INPUT_9: J1.78 RN7.6 | length 151.8
  Bottom Layer w10: RN7.6 1212.99,613.81 1245.65,581.15 J1.78
OPTO_INPUT_10: J1.80 RN7.4 | length 154.5
  Bottom Layer w10: RN7.4 1181.5,613.81 1220.65,574.66 J1.80
OPTO_INPUT_11: J1.82 RN7.2 | length 157.2
  Bottom Layer w10: RN7.2 1150,613.81 1195.65,568.16 J1.82
OPTO_OUT_C0: J1.24
OPTO_OUT_C1: J1.28
OPTO_OUT_C2: J1.34
OPTO_OUT_C3: J1.38
OPTO_OUT_E0: J1.26
OPTO_OUT_E1: J1.30
OPTO_OUT_E2: J1.36
OPTO_OUT_E3: J1.40
SLOT0_TCK: J1.102
SLOT0_TDI: J1.96
SLOT0_TDO: J1.98
SLOT0_TMS: J1.100
SLOT_ID0: J1.44 U3.1 | length 1489.5
  Mid-Layer 1 w5: v1(1870,561) 3057.86,561 3132.26,486.59 3155.41,486.59 3186.06,455.94 v1@3186.06,454.94
  Bottom Layer w5: J1.44 1860.99,549.99 1870,559 v1(1870,561) ; v1@3186.06,454.94 3213.43,427.57 U3.1
  other v1: 3186.56,455.44
SLOT_ID1: J1.46 U3.2 | length 1606.4
  Mid-Layer 1 w5: v1(1834,569) 1861.5,541.5 1924.5,541.5 1934,551 3039,551 3139,451 v1(3139,339)
  Bottom Layer w5: v1(1834,569) 1835.99,567.01 J1.46 ; v1(3139,339) 3212.43,339 U3.2
STEP1: J1.95
STEP2: J1.97
pads on no net: J1.0 J1.7 J1.9 J1.23 J1.25 J1.27 J1.29 J1.86 J1.88 J1.90 J1.92 U1.1 U1.5 U1.8 U2.8 U2.9

## Polygon pours and split planes (outlines as drawn)
GND on Internal Plane 1 (split plane): 3286.99,442.91 3286.99,20.1 2933.48,20.1 2933.48,442.91 2933.1,446.83 2931.95,450.6 2930.1,454.08 2927.6,457.12 2924.55,459.62 2921.08,461.48 2917.31,462.62 2913.39,463.01 620.39,463.01 620.39,541.34 620.35,541.78 620.06,546.89 619.13,552.38 617.59,557.72 615.46,562.86 612.77,567.73 609.55,572.27 605.84,576.42 601.69,580.12 597.16,583.34 592.29,586.03 587.15,588.16 581.8,589.7 576.32,590.63 570.77,590.94 565.21,590.63 559.73,589.7 554.38,588.16 549.24,586.03 544.37,583.34 539.84,580.12 535.69,576.42 531.98,572.27 528.76,567.73 526.07,562.86 523.94,557.72 522.4,552.38 521.47,546.89 521.18,541.78 521.14,541.34 521.14,463.01 393.7,463.01 389.78,462.62 386.01,461.48 382.54,459.62 379.49,457.12 376.99,454.08 375.13,450.6 373.99,446.83 373.6,442.91 373.6,20.1 20.1,20.1 20.1,1338.17 3286.99,1338.17
+12V on Internal Plane 2 (split plane): 3286.99,442.91 3286.99,20.1 2933.48,20.1 2933.48,442.91 2933.1,446.83 2931.95,450.6 2930.1,454.08 2927.6,457.12 2924.55,459.62 2921.08,461.48 2917.31,462.62 2913.39,463.01 620.39,463.01 620.39,541.34 620.35,541.78 620.06,546.89 619.13,552.38 617.59,557.72 615.46,562.86 612.77,567.73 609.55,572.27 605.84,576.42 601.69,580.12 597.16,583.34 592.29,586.03 587.15,588.16 581.8,589.7 576.32,590.63 570.77,590.94 565.21,590.63 559.73,589.7 554.38,588.16 549.24,586.03 544.37,583.34 539.84,580.12 535.69,576.42 531.98,572.27 528.76,567.73 526.07,562.86 523.94,557.72 522.4,552.38 521.47,546.89 521.18,541.78 521.14,541.34 521.14,463.01 393.7,463.01 389.78,462.62 386.01,461.48 382.54,459.62 379.49,457.12 376.99,454.08 375.13,450.6 373.99,446.83 373.6,442.91 373.6,20.1 20.1,20.1 20.1,1338.17 3286.99,1338.17
-12V on Internal Plane 3 (split plane): 3286.99,442.91 3286.99,20.1 2933.48,20.1 2933.48,442.91 2933.1,446.83 2931.95,450.6 2930.1,454.08 2927.6,457.12 2924.55,459.62 2921.08,461.48 2917.31,462.62 2913.39,463.01 620.39,463.01 620.39,541.34 620.35,541.78 620.06,546.89 619.13,552.38 617.59,557.72 615.46,562.86 612.77,567.73 609.55,572.27 605.84,576.42 601.69,580.12 597.16,583.34 592.29,586.03 587.15,588.16 581.8,589.7 576.32,590.63 570.77,590.94 565.21,590.63 559.73,589.7 554.38,588.16 549.24,586.03 544.37,583.34 539.84,580.12 535.69,576.42 531.98,572.27 528.76,567.73 526.07,562.86 523.94,557.72 522.4,552.38 521.47,546.89 521.18,541.78 521.14,541.34 521.14,463.01 393.7,463.01 389.78,462.62 386.01,461.48 382.54,459.62 379.49,457.12 376.99,454.08 375.13,450.6 373.99,446.83 373.6,442.91 373.6,20.1 20.1,20.1 20.1,1338.17 3286.99,1338.17

## Silkscreen, mask and mechanical layers (free items; w line width, h text height)
Top Overlay:
  text "1 Hz" at 249,571 h30
  text "GPS" at 246,522 h30
  text "PGM" at 3277,212 h30 r90
Bottom Overlay:
  lines w7.87: 2380,990 2430,960
Mechanical 13:
  lines w7.87: -137.8,-59.06 3503.94,-59.06 ; 2913.39,442.91 2913.39,0 3307.09,0 3307.09,442.91
  lines w10: 393.7,442.91 393.7,0 0,0 0,364.17 0,659.45 0,1358.27 3307.09,1358.27 3307.09,816.93 3307.09,442.91 ; 600.29,442.91 1653.54,442.91 2913.39,442.91
  text "Top of Baseboard" at 807.09,-127.95 h50

## Dimensions
0,0 to 0,1358.27 on Mechanical 13
0,0 to 393.7,0 on Mechanical 13
0,1358.27 to 3307.09,1358.27 on Mechanical 13
3307.09,442.91 to 3307.09,1358.27 on Mechanical 13
-137.8,-59.06 to -118.11,1358.27 on Mechanical 13

## Text inside footprints (layer, text, board x,y; h text height)
J1: Top Overlay "1" at 2474,575 h30; Top Overlay "PC01" at 2640,573 h30